# Altium PCB PCB2.PcbDoc
Units mm, origin at the board's own origin, x right, y up, seen from the top; angles counter-clockwise.
Board outline 98 x 44 mm, 4 copper layers (Top Layer, Int1 (GND), Int2 (PWR), Bottom Layer), stack 1.369 mm thick; 35 components, 49 nets, 257 pads, 54 vias.
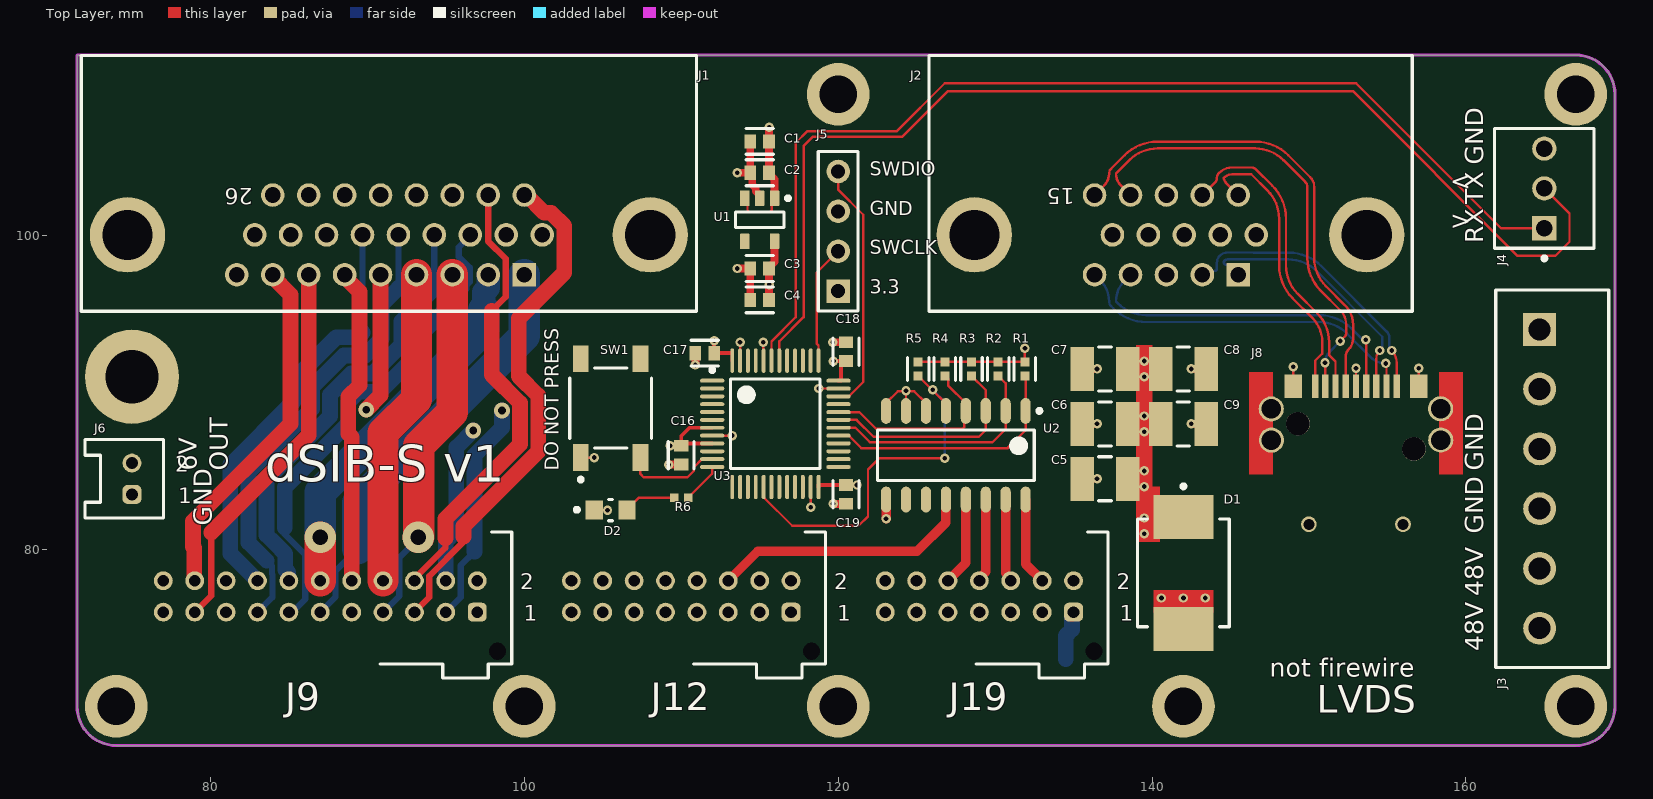
[diagram p0: Top Layer view]
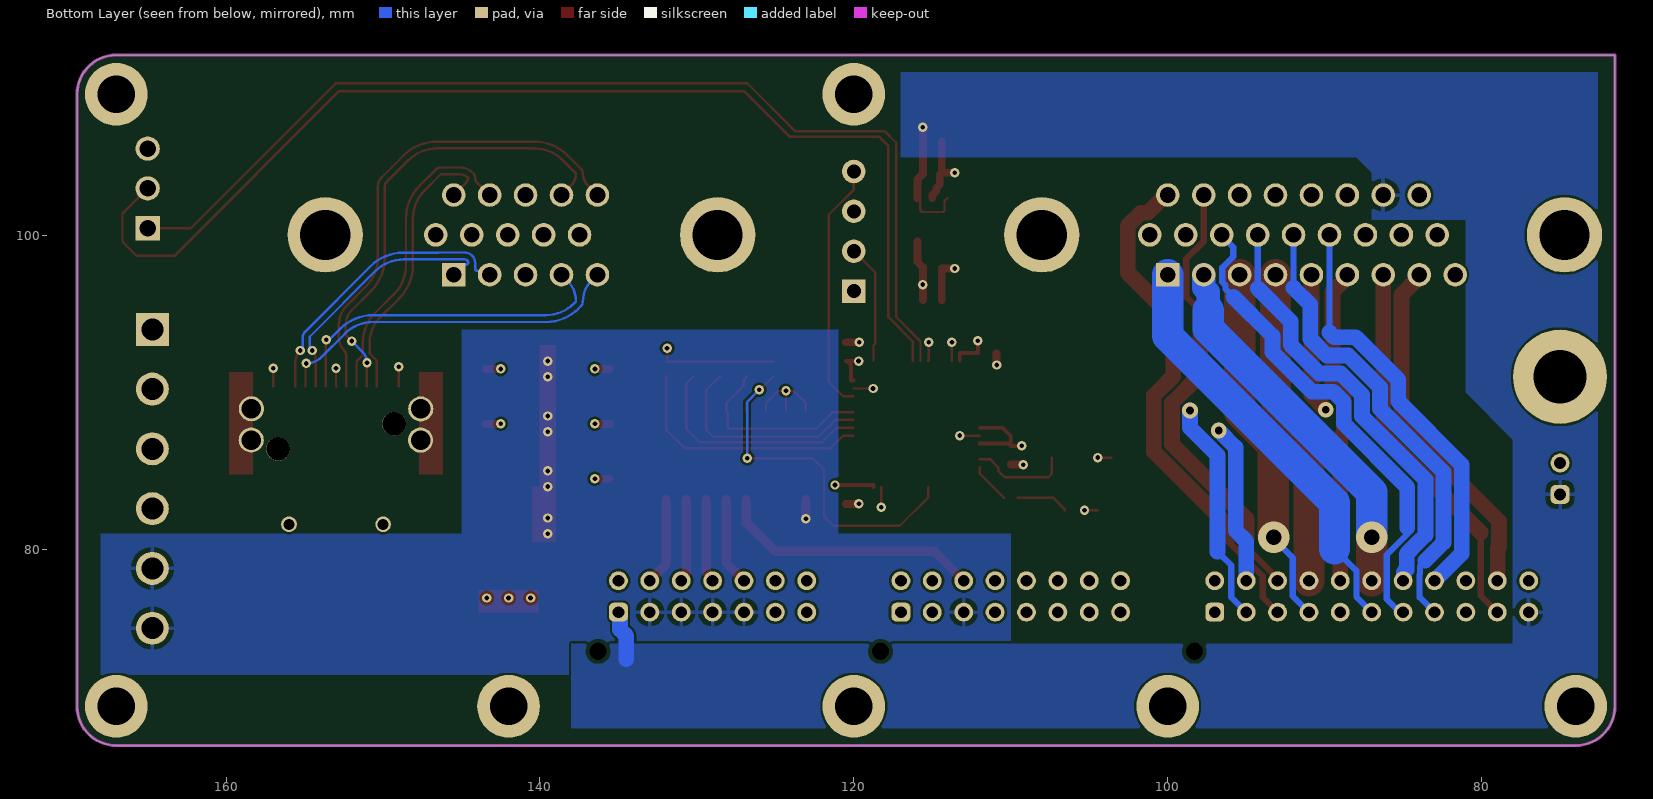
[diagram p1: Bottom Layer view, seen from below]
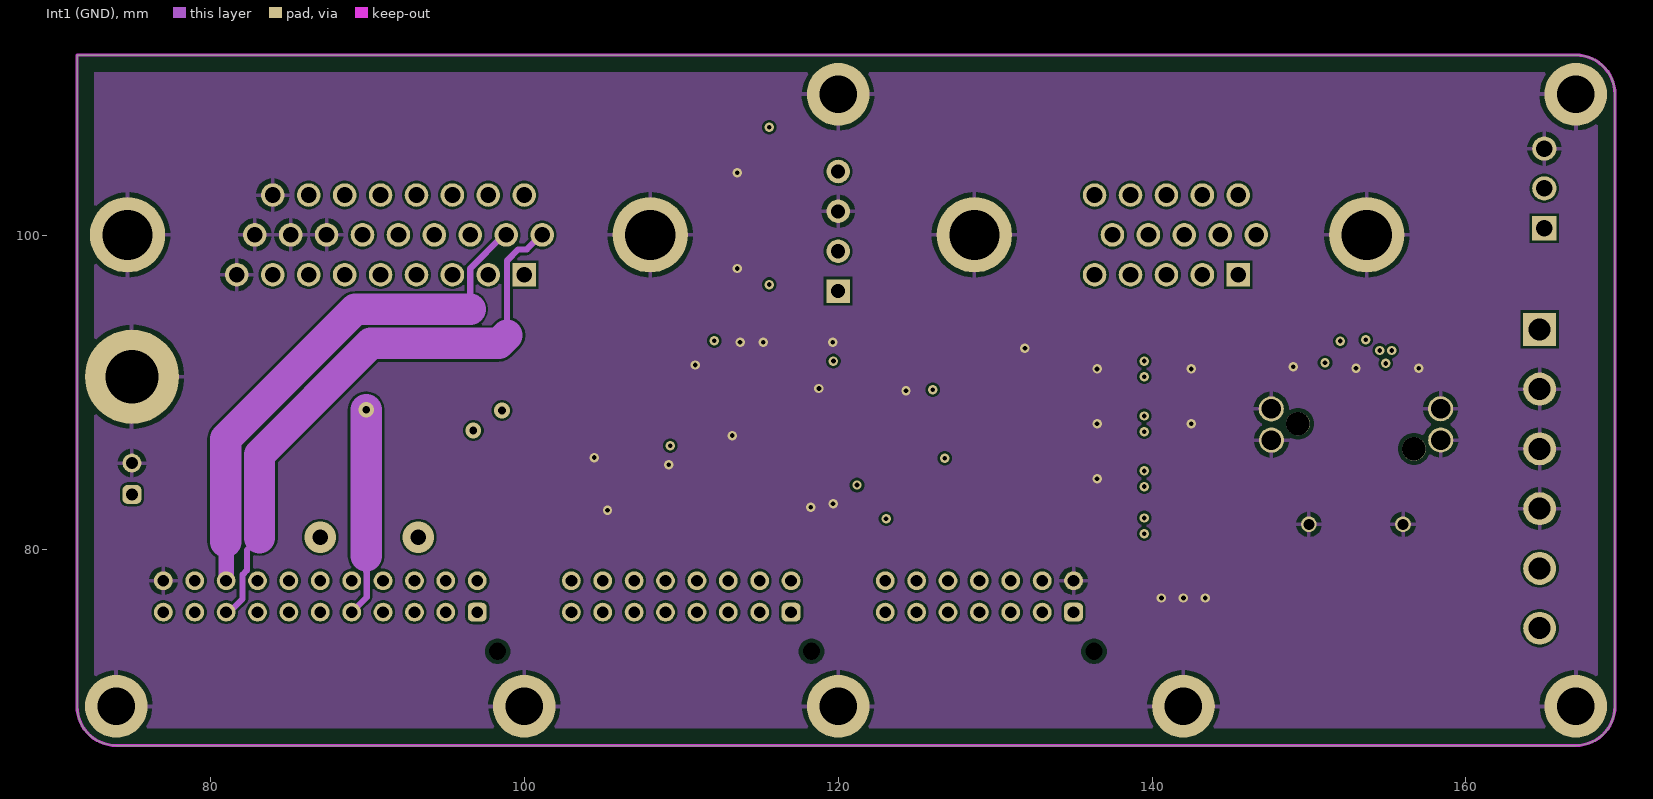
[diagram p2: Int1 (GND)]
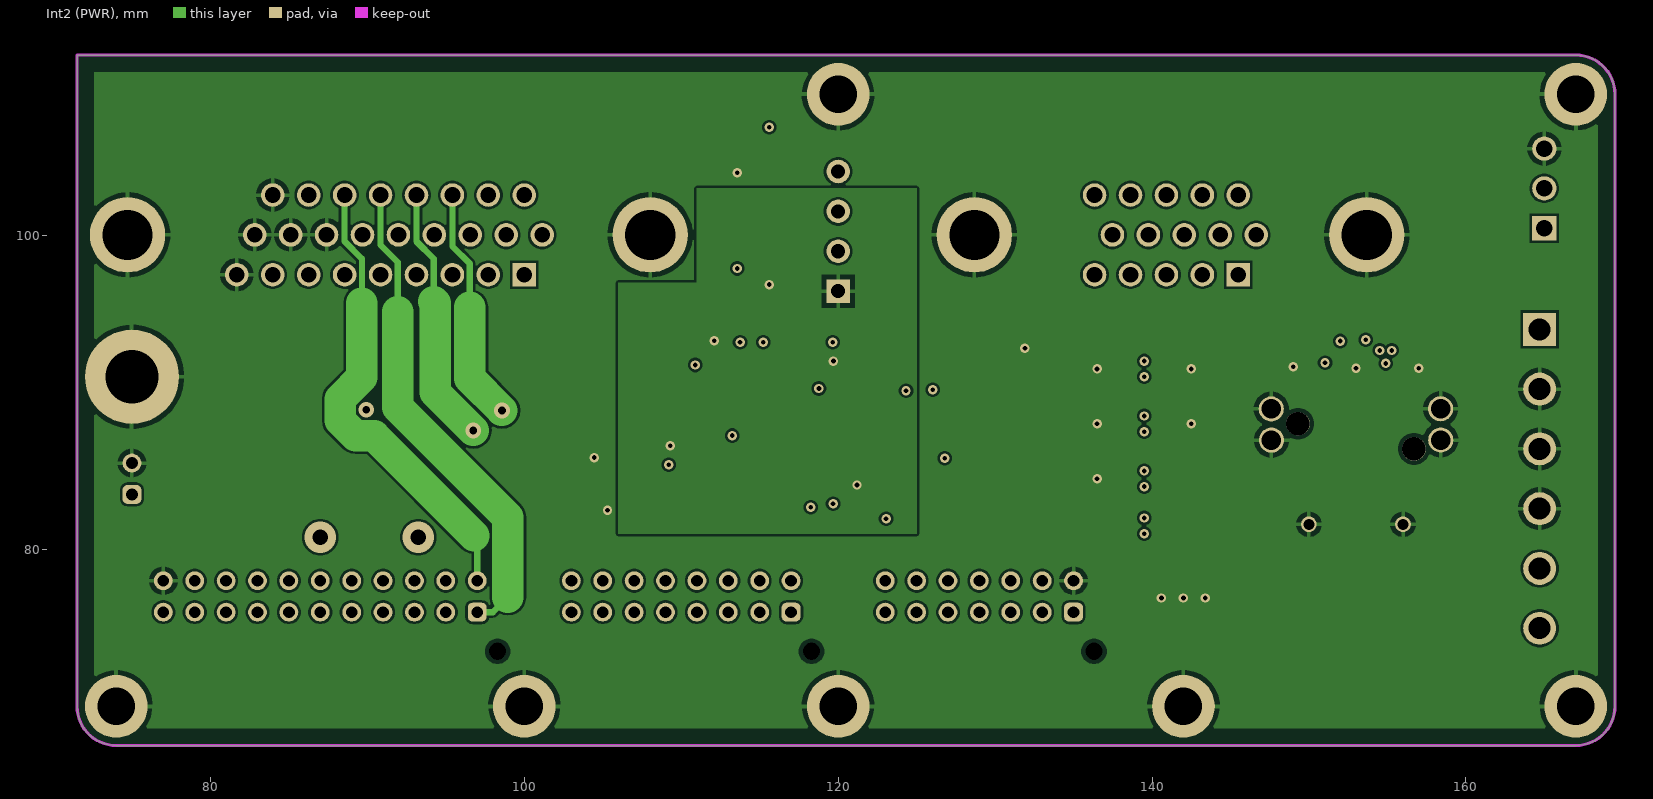
[diagram p3: Int2 (PWR)]
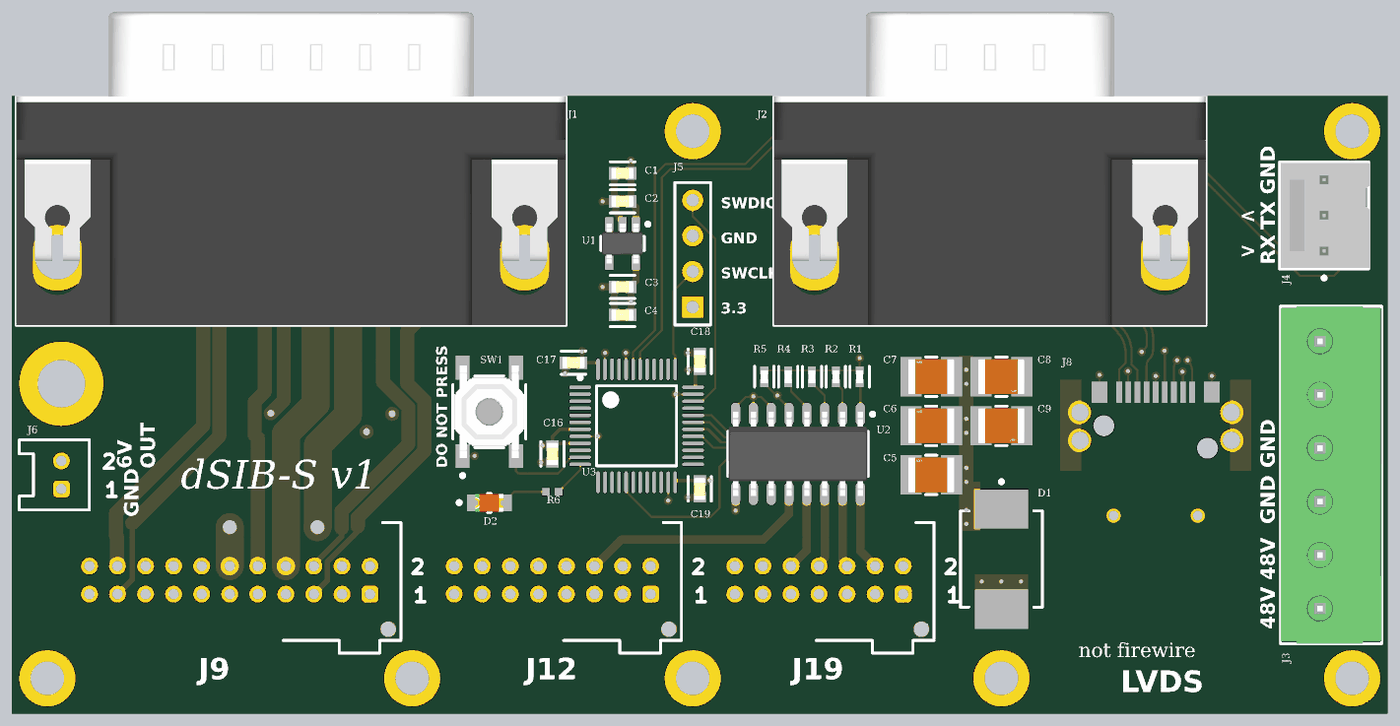
[diagram p4: 3D render of the assembled board from above, using the file's embedded part models]

## Layer stack, top to bottom
Top Solder: solder mask 0.0254, SM-001, Dk 4
Top Layer: signal copper 0.035
Dielectric 1: prepreg 0.1295, PP-017, Dk 4.3
Dielectric 2: prepreg 0.1295, PP-017, Dk 4.3
Int1 (GND): signal copper 0.035
Dielectric 3: core 0.7112, Core-039, Dk 4.8
Int2 (PWR): signal copper 0.035
Dielectric 4: prepreg 0.1295, PP-017, Dk 4.3
Dielectric 5: prepreg 0.1295, PP-017, Dk 4.3
Bottom Layer: signal copper 0.035
Bottom Solder: solder mask 0.0254, SM-001, Dk 4

## Board outline
71.5,70 ccw(c74,70) 74,67.5 167,67.5 ccw(c167,70) 169.5,70 169.5,109 ccw(c167,109) 167,111.5 71.5,111.5

## Design rules (kind name [scope] priority, off if disabled: settings)
BoardOutlineClearance [All] p1: gap=0.5 ignorepadtopadclearanceinfootprint=FALSE
Clearance Clearance_3 [InComponent('U12')] p1: gap=0.127 ignorepadtopadclearanceinfootprint=TRUE except(0.25: Arc-Hole Track-Hole SMDPad-Hole THPad-Hole Via-Hole Fill-Hole Poly-Hole Region-Hole Text-Hole)
Clearance Clearance_2 [InNetClass('hv')] p2: gap=0.25 ignorepadtopadclearanceinfootprint=TRUE
Clearance Clearance_1 [InPolygon vs OnLayer('Keep-Out Layer')] p3: gap=1 ignorepadtopadclearanceinfootprint=FALSE
Clearance [All] p4: gap=0.152 ignorepadtopadclearanceinfootprint=TRUE except(0.25: Arc-Hole Track-Hole SMDPad-Hole THPad-Hole Via-Hole Fill-Hole Poly-Hole Region-Hole Text-Hole)
ComponentClearance ComponentClearance_1 [HasFootprint('FP-D0008A-IPC_C')] p1: gap=-1000 collisioncheckmode=3 verticalgap=-1000 showdistances=FALSE donotcheckwithout3dbody=TRUE
ComponentClearance [All] p2: gap=0.102 collisioncheckmode=3 verticalgap=0.102 showdistances=TRUE
DiffPairsRouting [All] p1: maxlimit=1 minlimit=0.127 mostfreqgap=0.284 toplayer_mingap=0.284 toplayer_maxgap=0.284 toplayer_minwidth=0.152 toplayer_maxwidth=0.152 toplayer_prefwidth=0.152 midlayer1_minwidth=0.381 midlayer1_maxwidth=0.381 midlayer1_prefwidth=0.381 midlayer2_minwidth=0.381 midlayer2_maxwidth=0.381 midlayer2_prefwidth=0.381 bottomlayer_mingap=0.284 bottomlayer_maxgap=0.284 bottomlayer_minwidth=0.152 bottomlayer_maxwidth=0.152 bottomlayer_prefwidth=0.152 impedanceprofiledriven=TRUE maxuncoupledlength=12.7
Height [All] p1: minheight=0 maxheight=40 prefheight=12.7
HoleSize [All] p1: absolutevalues=TRUE maxlimit=6.3 minlimit=0.2 maxpercent=80.000 minpercent=20.000
HoleToHoleClearance [All] p1: gap=0.25 allowstackedmicrovias=FALSE
MinimumAnnularRing [All] p1: minimumring=0.076
MinimumSolderMaskSliver [All] p1: minsoldermaskwidth=0
PlaneClearance [All] p1: clearance=0.254
PlaneConnect PlaneConnect_1 [HasFootprint('TP_GND')] p1: planeconnectstyle=Direct reliefexpansion=0.508 reliefentries=4 reliefconductorwidth=0.254 reliefairgap=0.254
PlaneConnect PlaneConnectPowerPads [AsMM(Hole) > 3.4] p2: planeconnectstyle=Direct reliefexpansion=0.508 reliefentries=4 reliefconductorwidth=0.254 reliefairgap=0.254
PlaneConnect [All] p3: pad.planeconnectstyle=Relief pad.reliefexpansion=0.305 pad.reliefentries=4 pad.reliefconductorwidth=0.254 pad.reliefairgap=0.254 via.planeconnectstyle=Direct via.reliefexpansion=0.3 via.reliefentries=4 via.reliefconductorwidth=0.127 via.reliefairgap=0.127
PolygonConnect PolygonConnect_2 [HasFootprint('TP_GND')] p1: connectstyle=Direct reliefconductorwidth=0.254 reliefentries=4 polygonreliefangle="90 Angle" airgapwidth=0.254
PolygonConnect PolygonConnect_1 [InComponent('J4') And  Not  InNet('GND')] p2: connectstyle=Direct reliefconductorwidth=0.254 reliefentries=4 polygonreliefangle="90 Angle" airgapwidth=0.254
PolygonConnect PolygonConnectPowerPads [All vs (InPadClass('PowerPads'))] p3 off: connectstyle=Direct reliefconductorwidth=0.254 reliefentries=4 polygonreliefangle="90 Angle" airgapwidth=0.254
PolygonConnect [All] p4: thpad.connectstyle=Relief thpad.reliefconductorwidth=0.254 thpad.reliefentries=4 thpad.polygonreliefangle="90 Angle" thpad.airgapwidth=0.305 smdpad.connectstyle=NoConnect smdpad.reliefconductorwidth=0.102 smdpad.reliefentries=4 smdpad.polygonreliefangle="90 Angle" smdpad.airgapwidth=0.254 via.connectstyle=Direct via.reliefconductorwidth=0.127 via.reliefentries=4 via.polygonreliefangle="90 Angle" via.airgapwidth=0.127
RoutingVias [All] p1: holewidth=0.203 width=0.457 viastyle="Through Hole" minholewidth=0.2 minwidth=0.45 maxholewidth=6.3 maxwidth=6.55
ShortCircuit ShortCircuit_1 [InComponent('F1')] p1: allowed=TRUE
ShortCircuit [All] p2: allowed=FALSE
SilkToSilkClearance [All] p1: silktosilkclearance=0
SilkToSolderMaskClearance [IsPad] p1 off: minsilkscreentomaskgap=0.102 clearancetoexposedcopper=TRUE
SolderMaskExpansion [All] p1: expansion=0.05 istentingtop=FALSE
Width [All] p1: maxlimit=10 minlimit=0.127 preferedwidth=0.152
19 further rules are at their usual default settings.

## Classes and differential pairs
component class Sheet2: C1 C2 C3 C4 C5 C6 C7 C8 C9 C16 C17 C18 C19 D2 J5 R1 R2 R3 R4 R5 R6 SW1 U1 U2 U3
component class Sheet1: D1 J1 J2 J3 J4 J6 J8 J9 J12 J19
differential pair TDAT: +TDAT_P -TDAT_N
differential pair TCLK: +TCLK_P -TCLK_N
differential pair RDAT: +RDAT_P -RDAT_N
differential pair RCLK: +RCLK_P -RCLK_N

## Components (designator, comment, footprint, x,y, rotation, side; value= is the part's Value field where it differs from the comment)
C1 "C0603C225K4PACTU" FP-C0603C225K4PACTU-MFG 115,106 r180 top
C2 "C0603C225K4PACTU" FP-C0603C225K4PACTU-MFG 115,104 r180 top
C3 "C0603C225K4PACTU" FP-C0603C225K4PACTU-MFG 115,97.9 r180 top
C4 "C0603C225K4PACTU" FP-C0603C225K4PACTU-MFG 115,95.9 r180 top
C5 "12101C225KAT2A" FP-1210-L_3_3_0_4-W_2_5_0-IPC_B 137,84.5 r180 top
C6 "12101C225KAT2A" FP-1210-L_3_3_0_4-W_2_5_0-IPC_B 137,88 r180 top
C7 "12101C225KAT2A" FP-1210-L_3_3_0_4-W_2_5_0-IPC_B 137,91.5 r180 top
C8 "12101C225KAT2A" FP-1210-L_3_3_0_4-W_2_5_0-IPC_B 142,91.5 r0 top
C9 "12101C225KAT2A" FP-1210-L_3_3_0_4-W_2_5_0-IPC_B 142,88 r0 top
C16 "C0603C225K4PACTU" FP-C0603C225K4PACTU-MFG 110,86 r270 top
C17 "C0603C225K4PACTU" FP-C0603C225K4PACTU-MFG 111.5,92.5 r180 top
C18 "C0603C225K4PACTU" FP-C0603C225K4PACTU-MFG 120.5,92.6 r90 top
C19 "C0603C225K4PACTU" FP-C0603C225K4PACTU-MFG 120.5,83.5 r270 top
D1 "1SMC48AT3G" ONSC-SMC-2-403-03_V 142,78.5 r270 top
D2 "150080SS75000" FP-150080SS75000-MFG 105.5,82.5 r0 top
J1 "618026325323" 618026325323 91.37,103.32 r180 top
J2 "618015325323" 618015325323 141.18,103.32 r180 top locked
J3 "691321300006" 691321300006 165.5,84.5 r270 top
J4 "22-23-2031" MOLX-22-23-2031_V 165,103 r90 top
J5 "Header 4" HDR1X4 120,96.46 r90 top
J6 "Header 2" jst_2mm 75,83.5 r0 top
J8 "da vinci lvds connector" 1394b 153,86 r90 top
J9 "Header 11X2H" jst_pad22 97,76 r0 top
J12 "Header 8X2H" jst_pad16 117,76 r0 top
J19 "Header 7X2H" jst_pad14 135,76 r0 top
R1 "CRCW040220K0FKED" FP-CRCW0402-e3-IPC_B 131.9,91.5 r270 top
R2 "CRCW040220K0FKED" FP-CRCW0402-e3-IPC_B 130.2,91.5 r270 top
R3 "CRCW040220K0FKED" FP-CRCW0402-e3-IPC_B 128.5,91.5 r270 top
R4 "CRCW040220K0FKED" FP-CRCW0402-e3-IPC_B 126.8,91.5 r270 top
R5 "CRCW040220K0FKED" FP-CRCW0402-e3-IPC_B 125.1,91.5 r270 top
R6 "ERJ-2RKF2401X" RESC1005X40X25NL05T05 110,83.3 r180 top
SW1 "8-1437565-1" FP-8-1437565-1-MFG 105.5,89 r90 top
U1 "LP5907MFX-3.3/NOPB" DBV0005A_N 115,101 r270 top
U2 "ULN2003ADR" D0016A_M 127.5,86 r270 top
U3 "STM32F103C8T6" STM-LQFP48_L 116,88 r0 top

## Footprints (in the part's own frame and the unit in brackets; to place one, negate y for a bottom-side part, rotate by r counter-clockwise, add the part's x,y. Pads: shape width x height; smd on the part's side, far side on the other; paste and mask are expansions set on the pad)
1394b [mm]
  round 1.5 hole 1.5 unplated: 0(0.401,-3.691) 0(2.007,3.699)
  rect 1.5x0.4 smd mask+0: 1(4.401,2.605) 2(4.401,1.305) 3(4.401,-1.295) 4(4.401,-2.595) 5(4.401,-1.945) 6(4.401,-0.645) 7(4.401,0.005) 8(4.401,0.655) 9(4.401,1.955)
  round 1 hole 0.7 mask+0: 10(-4.403,-2.995) 10(-4.403,3.003)
  round 1.6 hole 1.25: 10(0.959,5.393) 10(0.964,-5.4) 10(2.953,5.4) 10(2.958,-5.393)
  rect 1.5x1.1 smd mask+0: 10(4.398,4.005) 10(4.403,-4.001)
  Top Layer region: -1.2,-5.3 5.3,-5.3 5.3,-6.8 -1.2,-6.8
  Top Layer region: -1.205,5.307 5.295,5.307 5.295,6.807 -1.205,6.807
  body extent -6.09,-6.79 5.01,6.8, height 8
618015325323 [mm] "15 pins, right angled without Hex Screw"
  rect 1.5x1.5 hole 1: 1(-4.32,5.82)
  round 1.5 hole 1: 2(-2.03,5.82) 3(0.26,5.82) 4(2.55,5.82) 5(4.84,5.82) 6(-5.46,3.28) 7(-3.17,3.28) 8(-0.88,3.28) 9(1.41,3.28) 10(3.7,3.28) 11(-4.32,0.74) 12(-2.03,0.74) 13(0.26,0.74) 14(2.55,0.74) 15(4.84,0.74)
  round 4.8 hole 3.2: M1(-12.5,3.28) M2(12.5,3.28)
  silkscreen extent -15.4,-8.15 15.4,8.15, body extent -15.4,-14.15 15.4,8.15, height 12.75
618026325323 [mm] "26 pins, right angled without Hex Screw"
  rect 1.5x1.5 hole 1: 1(-8.63,5.82)
  round 1.5 hole 1: 2(-6.34,5.82) 3(-4.05,5.82) 4(-1.76,5.82) 5(0.53,5.82) 6(2.82,5.82) 7(5.11,5.82) 8(7.4,5.82) 9(9.69,5.82) 10(-9.77,3.28) 11(-7.48,3.28) 12(-5.19,3.28) 13(-2.9,3.28) 14(-0.61,3.28) 15(1.68,3.28) 16(3.97,3.28) 17(6.26,3.28) 18(8.55,3.28) 19(-8.63,0.74) 20(-6.34,0.74) 21(-4.05,0.74) 22(-1.76,0.74) 23(0.53,0.74) 24(2.82,0.74) 25(5.11,0.74) 26(7.4,0.74)
  round 4.8 hole 3.2: M1(-16.65,3.28) M2(16.65,3.28)
  silkscreen extent -19.6,-8.15 19.6,8.15, body extent -19.6,-14.15 19.6,8.15, height 12.75
691321300006 [mm] "Vertical PCB Header, pitch 3.81mm, 06p"
  rect 2.1x2.1 hole 1.4: 1(-9.525,-0.8)
  round 2.1 hole 1.4: 2(-5.715,-0.8) 3(-1.905,-0.8) 4(1.905,-0.8) 5(5.715,-0.8) 6(9.525,-0.8)
  silkscreen extent -12.02,-3.6 12.03,3.6, body extent -12.02,-3.6 12.02,3.6, height 9.25
D0016A_M [mm] "SOIC, 16-Leads, Body 10x4mm, Pitch 1.27mm, IPC Low Density"
  oval 1.65x0.65 smd: 1(-2.825,4.445) 2(-2.825,3.175) 3(-2.825,1.905) 4(-2.825,0.635) 5(-2.825,-0.635) 6(-2.825,-1.905) 7(-2.825,-3.175) 8(-2.825,-4.445) 9(2.825,-4.445) 10(2.825,-3.175) 11(2.825,-1.905) 12(2.825,-0.635) 13(2.825,0.635) 14(2.825,1.905) 15(2.825,3.175) 16(2.825,4.445)
  silkscreen extent -2.95,-5 1.6,5.45, body extent -3,-4.95 3,4.95, height 1.59
DBV0005A_N [mm] "SOT23, 5-Leads, Body 3.05x1.75mm, Pitch 0.95mm, IPC Medium Density"
  rrect17% 1x0.6 smd: 1(-1.375,0.95) 2(-1.375,0) 3(-1.375,-0.95) 4(1.375,-0.95) 5(1.375,0.95)
  silkscreen extent -1.5,-1.55 0.5,1.93, body extent -1.42,-1.46 1.42,1.46, height 1.08
FP-8-1437565-1-MFG [mm]
  rect 1.7x1 smd paste+0 mask+0: 1(-3.15,1.9) 2(3.15,1.9) 3(-3.15,-1.9) 4(3.15,-1.9)
  silkscreen extent -4.67,-2.6 2.55,2.6, body extent -4.1,-2.7 4.1,2.7, height 0.25
FP-1210-L_3_3_0_4-W_2_5_0-IPC_B [mm]
  rect 1.503x2.804 smd paste+0 mask+0: 1(-1.45,0) 2(1.45,0)
  silkscreen extent -0.4,-1.4 0.4,1.4, body extent -2.45,-1.65 2.45,1.65, height 0.25
FP-150080SS75000-MFG [mm]
  rect 1.1x1.2 smd paste+0 mask+0: 1(-1.05,0) 2(1.05,0)
  silkscreen extent -2.27,-0.67 0.13,0.67, body extent -1.7,-0.77 1.7,0.77, height 0.25
FP-C0603C225K4PACTU-MFG [mm]
  rect 0.75x0.9 smd paste+0 mask+0: 1(-0.6,0) 2(0.6,0)
  silkscreen extent -0.87,-0.82 0.87,0.82, body extent -1.2,-0.6 1.2,0.6, height 0.25
FP-CRCW0402-e3-IPC_B [mm]
  rect 0.568x0.572 smd paste+0 mask+0: 1(-0.452,0) 2(0.452,0)
  silkscreen extent -0.74,-0.69 0.74,0.69, body extent -0.89,-0.44 0.89,0.44, height 0.25
HDR1X4 [mm] "Connector; Header; 4 Position"
  rect 1.5x1.5 hole 0.9: 1(0,0)
  round 1.5 hole 0.9: 2(2.54,0) 3(5.08,0) 4(7.62,0)
  silkscreen extent -1.27,-1.27 8.89,1.27
jst_2mm [mm]
  rrect50% 1.2x1.2 hole 0.75: 1(0,0)
  round 1.2 hole 0.75: 2(0,2)
  silkscreen extent -3,-1.5 2,3.5
jst_pad14 [mm]
  round 0 hole 1.1: 0(1.3,-2.5)
  rrect50% 1.2x1.2 hole 0.75: 1(0,0)
  round 1.2 hole 0.75: 2(0,2) 3(-2,0) 4(-2,2) 5(-4,0) 6(-4,2) 7(-6,0) 8(-6,2) 9(-8,0) 10(-8,2) 11(-10,0) 12(-10,2) 13(-12,0) 14(-12,2)
  silkscreen extent -6.2,-4.2 2.2,5.1
jst_pad16 [mm]
  round 0 hole 1.1: 0(1.3,-2.5)
  rrect50% 1.2x1.2 hole 0.75: 1(0,0)
  round 1.2 hole 0.75: 2(0,2) 3(-2,0) 4(-2,2) 5(-4,0) 6(-4,2) 7(-6,0) 8(-6,2) 9(-8,0) 10(-8,2) 11(-10,0) 12(-10,2) 13(-12,0) 14(-12,2) 15(-14,0) 16(-14,2)
  silkscreen extent -6.2,-4.2 2.2,5.1
jst_pad22 [mm]
  round 0 hole 1.1: 0(1.3,-2.5)
  rrect50% 1.2x1.2 hole 0.75: 1(0,0)
  round 1.2 hole 0.75: 2(0,2) 3(-2,0) 4(-2,2) 5(-4,0) 6(-4,2) 7(-6,0) 8(-6,2) 9(-8,0) 10(-8,2) 11(-10,0) 12(-10,2) 13(-12,0) 14(-12,2) 15(-14,0) 16(-14,2) 17(-16,0) 18(-16,2) 19(-18,0) 20(-18,2) 21(-20,0) 22(-20,2)
  silkscreen extent -6.2,-4.2 2.2,5.1
MOLX-22-23-2031_V [mm] "CONN, 3-Leads, Body 7.62x6.35mm, Pitch 2.54mm"
  rect 1.55x1.55 hole 1.05: 1(-2.54,0)
  round 1.55 hole 1.05: 2(0,0) 3(2.54,0)
  silkscreen extent -4.58,-3.18 3.81,3.18, body extent -3.73,-3.25 3.73,3.1, height 10.67
ONSC-SMC-2-403-03_V [mil] "Molded, 2-Leads, Body 6.86x5.84mm"
  rect 110x150 smd: 1(-140.49,0) 2(140.49,0)
  silkscreen extent -222,-115 135,115, body extent -135,-115 135,115, height 99
RESC1005X40X25NL05T05 [mm] "Chip Resistor, 2-Leads, Body 1.00x0.50mm, IPC Medium Density"
  rect 0.55x0.55 smd: 1(-0.45,0) 2(0.45,0)
  body extent -0.53,-0.27 0.53,0.28, height 0.4
STM-LQFP48_L [mm] "QFP, 48-Leads, Body 7x7mm, Pitch 0.5mm, IPC High Density"
  oval 1.55x0.25 smd: 1(-4.025,2.75) 2(-4.025,2.25) 3(-4.025,1.75) 4(-4.025,1.25) 5(-4.025,0.75) 6(-4.025,0.25) 7(-4.025,-0.25) 8(-4.025,-0.75) 9(-4.025,-1.25) 10(-4.025,-1.75) 11(-4.025,-2.25) 12(-4.025,-2.75) 25(4.025,-2.75) 26(4.025,-2.25) 27(4.025,-1.75) 28(4.025,-1.25) 29(4.025,-0.75) 30(4.025,-0.25) 31(4.025,0.25) 32(4.025,0.75) 33(4.025,1.25) 34(4.025,1.75) 35(4.025,2.25) 36(4.025,2.75)
  oval 0.25x1.55 smd: 13(-2.75,-4.025) 14(-2.25,-4.025) 15(-1.75,-4.025) 16(-1.25,-4.025) 17(-0.75,-4.025) 18(-0.25,-4.025) 19(0.25,-4.025) 20(0.75,-4.025) 21(1.25,-4.025) 22(1.75,-4.025) 23(2.25,-4.025) 24(2.75,-4.025) 37(2.75,4.025) 38(2.25,4.025) 39(1.75,4.025) 40(1.25,4.025) 41(0.75,4.025) 42(0.25,4.025) 43(-0.25,4.025) 44(-0.75,4.025) 45(-1.25,4.025) 46(-1.75,4.025) 47(-2.25,4.025) 48(-2.75,4.025)
  silkscreen extent -4.15,-2.85 2.85,3.55, body extent -3.5,-3.5 3.5,3.5, height 1.6

## Part data
C1 C2 C3 C4 C16 C17 C18 C19: library part CMP-2006-02259-2, "CAP CER 2.2UF 16V X5R 0603", Capacitance=2.2uF, Case Code (Imperial)=0603, Case Code (Metric)=1608, Dielectric=X5R, Dielectric Material=Ceramic, Max Operating Temperature=85°C, Min Operating Temperature=-55°C, Package Quantity=1, Tolerance=10%, Voltage=16V, Case/Package=0603, Construction=Flat, Contact Plating=Tin, Depth=0.8mm, Dissipation Factor=5%, Height=0.8mm, Lead Free="Lead Free", Length=1.6mm, Mount="Surface Mount", Number of Pins=2, Packaging="Tape and Reel", Radiation Hardening=No, REACH SVHC="No SVHC", RoHS Compliant=Yes, Series=C, Termination=SMD/SMT, Thickness=0.034inch, Voltage Rating=16V, Voltage Rating (DC)=16V, Width=0.8mm
C5 C6 C7 C8 C9: library part CMP-1038-02104-3, "General Purpose Ceramic Capacitor, 1210, 2.2uF, 10%, X7R, 15%, 100V", Capacitance=2.2uF, Case Code (Imperial)=1210, Case Code (Metric)=3225, Dielectric=X7R, Max Operating Temperature=125°C, Min Operating Temperature=-55°C, Package Quantity=1, Tolerance=10%, Voltage=100V, Case/Package=1210, Construction=Flat, Contact Plating=Tin, Depth=2.5mm, Dissipation Factor=2.5%, Height=2.79mm, Lead Free="Lead Free", Length=3.2mm, Mount="Surface Mount", Number of Pins=2, Packaging="Tape and Reel", Radiation Hardening=No, REACH SVHC="No SVHC", RoHS Compliant=Yes, Series=-, Termination=SMD/SMT, Thickness=0.11inch, Voltage Rating=100V, Voltage Rating (DC)=100V, Width=2.5mm
D1: library part CMP-1061-00550-1, "1500 W Peak Power Zener Transient Voltage Suppressor, Unidirectional, 2-Pin SMC, Pb-Free, Tape and Reel", Manufacturer="On Semiconductor", ComponentLink1Description="Manufacturer URL", ComponentLink1URL=http://www.onsemi.com/, ComponentLink2Description=Datasheet, ComponentLink2URL=http://www.onsemi.com/pub_link/Collateral/1SMC5.0AT3-D.PDF, ComponentLink3Description="Package Specification", ComponentLink3URL=http://www.onsemi.com/pub_link/Collateral/403-03.PDF, DatasheetVersion="Rev. 8", Direction=Unidirectional, IR Max (uA)=5, Mounting Technology="Surface Mount", PackageDescription="2-Pin Small Molded Package, J-Bend Lead, Body 5.845 x 6.855 mm", PackageReference=SMC-2-403-03, PackageVersion="Rev. E, 08/2005", Packing="Tape and Reel", PartNumber=1SMC48AT3G, PPK Max (W)=1500, RoHS=Pb-Free, V(BR) Typ (V)=56.1
D2: library part CMP-1426-00010-2, "LED RED CLEAR 0805 SMD", Case Code (Imperial)=0805, Case Code (Metric)=2012, Color=Red, Forward Current=30mA, Forward Voltage=1.9V, Lens Color=Colorless, Max Operating Temperature=85°C, Min Operating Temperature=-40°C, Package Quantity=1, Test Current=20mA, Case/Package=0805, Dominant Wavelength=630nm, Height=0.8mm, Length=2mm, Lens Size=1.25mm, Lens Style=Clear, Lens Transparency=Clear, Luminous Intensity=60mcd, Mount="Surface Mount", Packaging="Cut Tape", RoHS Compliant=Yes, Series=WL-SMCW, Viewing Angle=140°, Wavelength=630nm, Width=1.25mm
J1: library part CMP-1502-00305-1, "Male High Density PCB Connector without Hex Screw WR-DSUB, Angled, 26 pins", Contact Resistance=30mOhm, Manufacturer="Wurth Elektronik", Operating Temperature=-40to85degC, Rated Current=3A, Working Voltage=60VAC, Datasheet URL=https://katalog.we-online.de/em/datasheet/6180xx325323.pdf, Gender=Male, Manufacturer URL=http://www.we-online.de, Mounting Technology=THT, Orientation=Angled, Package Reference=618026325323, Packaging=Tray, Part Number=618026325323, Pin Number=26, Publisher=WurthElektronik
J2: library part CMP-1502-00304-1, "Male High Density PCB Connector without Hex Screw WR-DSUB, Angled, 15 pins", Contact Resistance=30mOhm, Manufacturer="Wurth Elektronik", Operating Temperature=-40to85degC, Rated Current=3A, Working Voltage=60VAC, Datasheet URL=https://katalog.we-online.de/em/datasheet/6180xx325323.pdf, Gender=Male, Manufacturer URL=http://www.we-online.de, Mounting Technology=THT, Orientation=Angled, Package Reference=618015325323, Packaging=Tray, Part Number=618015325323, Pin Number=15, Publisher=WurthElektronik
J3: library part CMP-1502-01867-1, "Serie 321 - 3.81mm Vertical PCB Header WR-TBL, 6 pin", Manufacturer="Wurth Elektronik", Operating Temperature=-40to105degC, Datasheet URL=http://katalog.we-online.de/em/datasheet/6913213000xx.pdf, Gender=Male, Manufacturer URL=http://www.we-online.de, Mounting Technology=THT, Package Reference=691321300006, Packaging=Box, Part Number=691321300006, Pin Number=6, Pitch=3.81mm, Publisher=WurthElektronik
J4: library part CMP-2000-05242-1, "Male Header, Pitch 2.54 mm, 1 x 3 Position, Height 8.18 mm, Tail Length 3.56 mm, RoHS, Bulk", Current Rating=4A, Manufacturer=Molex, Voltage Rating=250V, Brand=Molex, Contact Gender=Pin(Male), Contact Material=Brass, Contact Plating=Tin, Datasheet URL=https://datasheet.ciiva.com/19472/232274-19472863.pdf, Datasheet Version=Sep-01, Factory Pack Quantity=16000, Housing Material=Nylon, Manufacturer URL=http://www.molex.com/, Mounting Angle=Vertical, Mounting Style=ThroughHole, Number of Positions=3Position, Number of Rows=1Row, Packaging=Bulk, Pitch=2.54mm, Product=Headers, Product Category=Headers&WireHousings, RoHS=Details, Series=6373, Termination Style=ThroughHole, Tradename=KK, Type=Locking
J5: "Header, 4-Pin", LatestRevisionDate=17-Jul-2002, LatestRevisionNote="Re-released for DXP Platform.", Publisher="Altium Limited"
J6: "Header, 2-Pin", LatestRevisionDate=17-Jul-2002, LatestRevisionNote="Re-released for DXP Platform.", Publisher="Altium Limited"
J8: library part davinci_lvds
J9: "Header, 11-Pin, Dual row, Right Angle", LatestRevisionDate=17-Jul-2002, LatestRevisionNote="Re-released for DXP Platform.", Publisher="Altium Limited"
J12: "Header, 8-Pin, Dual row, Right Angle", LatestRevisionDate=17-Jul-2002, LatestRevisionNote="Re-released for DXP Platform.", Publisher="Altium Limited"
J19: "Header, 7-Pin, Dual row, Right Angle", LatestRevisionDate=17-Jul-2002, LatestRevisionNote="Re-released for DXP Platform.", Publisher="Altium Limited"
R1 R2 R3 R4 R5: library part CMP-2002-08356-2, "RES Thick Film, 20kΩ, 1%, 0.063W, 100ppm/°C, 0402", Case Code (Imperial)=0402, Case Code (Metric)=1005, Max Operating Temperature=155°C, Max Power Dissipation=63mW, Min Operating Temperature=-55°C, Package Quantity=10, Resistance=20kR, Temperature Coefficient=100ppm/°C, Tolerance=1%, Voltage Rating=50V, Case/Package=0402, Composition="Thick Film", Contact Plating=Tin, Depth=0.5mm, Features="Automotive AEC-Q200", Height=0.35mm, Lead Free="Lead Free", Length=1mm, Military Standard=Not, Mount="Surface Mount", Number of Pins=2, Number of Terminations=2, Packaging="Tape and Reel", Power Rating=63mW, Radiation Hardening=No, Termination=SMD/SMT, Voltage Rating (DC)=50V, Weight=2.3E-05oz, Width=0.5mm, Working Voltage=50V
R6: library part CMP-2002-00798-1, Manufacturer=Panasonic, Part Number=ERJ-2RKF2401X
SW1: library part CMP-03407-000016-1, "SWITCH TACTILE SPST-NO 0.02A 15V", Case/Package=SMD/SMT, Contact Current Rating=20mA, Contact Resistance=100mR, Max Operating Temperature=85°C, Max Voltage Rating (DC)=15V, Min Operating Temperature=-35°C, Operating Force=1.57N, Package Quantity=4000, Actuator Length=0.4mm, Actuator Material=Brass, Actuator Type=Standard, Contact Material="Copper Alloy", Contact Plating=Silver, Electrical Life=500000Cycles, ELV=Compliant, Illumination Type=Non-Illuminated, Max Current Rating=20mA, Mechanical Life=500000Cycles, Mount="Surface Mount", Orientation=Straight, Packaging="Tape and Reel", Radiation Hardening=No, RoHS Compliant=Yes, Series=FSMCT, Switch Function=Off-Mom, Switch Travel=0.25mm, Termination="Gull Wing", Throw Configuration=SPST, Type=Switch, Voltage Rating (DC)=15V
U1: library part CMP-2000-07464-2, "None", Case/Package=SOT-23, Dropout Voltage=250mV, Max Input Voltage=5.5V, Max Operating Temperature=125°C, Max Output Current=250mA, Min Input Voltage=2.2V, Min Operating Temperature=-40°C, Nominal Output Voltage=3.3V, Output Voltage Accuracy=2%, Package Quantity=3000, Power Supply Rejection Ratio (PSRR)=82dB, Quiescent Current=425uA, Accuracy=2%, Contact Plating=Tin, Lead Free="Lead Free", Mount="Surface Mount", Number of Outputs=1, Number of Pins=5, Number of Regulators=1, Output Current=250mA, Output Type=Fixed, Output Voltage=3.3V, Packaging="Tape and Reel", Polarity=Positive, Radiation Hardening=No, REACH SVHC="No SVHC", RoHS Compliant=Yes
U2: library part CMP-2000-04953-1, "High-Voltage, High-Current Darlington Transistor Array, 0.5 A, 50 V, -20 to 70 degC, 16-Pin SOIC (D), Green (RoHS & no Sb/Br), Tape and Reel", Manufacturer=TexasInstruments, Maximum Collector Emitter Saturation Voltage=1.1@100mA, Maximum Collector Emitter Voltage=50V, Package=16SOIC, Package Description="16-Pin Plastic Small Outline, Body 9.9 x 3.9 mm, Pitch 1.27 mm", Package Reference=D16, Package Version="4040047-6/M, 06/2011", Peak DC Collector Current=0.5A, Category=DarlingtonBJT, Configuration=Array7, Datasheet URL=http://www.ti.com/general/docs/lit/getliterature.tsp?genericPartNumber=uln2003a&fileType=pdf, Datasheet Version="Rev. O, 01/2016", Manufacturer URL=http://www.ti.com/, Mounting=SurfaceMount, Package URL=http://www.ti.com/lit/ml/mpds178g/mpds178g.pdf, Packaging=Tape&Reel, Rad Hard=No, Type=NPN
U3: library part CMP-0237-00215-3, "ARM Cortex-M3 32-bit MCU, 64 KB Flash, 20 KB Internal RAM, 37 I/Os, 48-pin LQFP, -40 to 85 degC, Tray", I/Os (High Current)=37, Operating Frequency(F) (Processor speed) (MHz)=72, Supply Voltage(Vcc) min (V)=2, A/D Converter="2x12-bit (10 Channel)", ComponentLink1Description="Manufacturer URL", ComponentLink1URL=http://www.st.com/web/en/home.html, ComponentLink2Description=Datasheet, ComponentLink2URL=http://www.st.com/st-web-ui/static/active/en/resource/technical/document/datasheet/CD00161566.pdf, ComponentLink3Description="Package Specification", ComponentLink3URL=http://www.st.com/st-web-ui/static/active/en/resource/technical/document/datasheet/DM00058181.pdf, Core="ARM Cortex-M3", DatasheetVersion="Rev. 16", FLASH Size (Prog) (kB)=64, Internal RAM Size (kB)=20, Mounting Technology="Surface Mount", PackageDescription="48-Pin Low Profile Quad Flat Package, 7 x 7 mm Body, 0.5 mm Pitch", PackageReference=LQFP48, PackageVersion="Rev. 6, 06/2013", Packing=Tray, PartNumber=STM32F103C8T6

## Free pads (board coordinates)
  round 4 hole 2.4: 0(74,70) 0(100,70) 0(120,70) 0(120,109) 0(142,70) 0(167,70) 0(167,109)
  round 6 hole 3.4: 0(75,91)

## Via types
v1: diameter 0.6, hole 0.3, Top Layer to Bottom Layer, tented both sides, 49 vias
v2: diameter 1, hole 0.5, Top Layer to Bottom Layer, tented both sides, 3 vias
v3: diameter 2, hole 1, Top Layer to Bottom Layer, tented both sides, 2 vias

## Nets (pads, with @x,y where several pads share a name; then routed paths per layer and width w, separated by ;. In a path a pad name is that pad's centre, name@x,y a point inside that pad or via, vN(x,y) a via of type N, cw(c..) or ccw(c..) an arc to the next point about the centre after c; other vN are vias at no path point)
/BRAKE1: J1.20 J9.6 | length 28.9
  Top Layer w0.4: J9.6 93,78.128 94.975,80.103 94.975,80.7 ; J1.20 97.71,99.621 98.812,98.519 98.812,96.087 97.925,95.2
  Top Layer w1: 94.975,80.7 94.975,81.95 99.727,86.702 99.727,89.327 97.925,91.13 97.925,95.2
/BRAKE2: J1.22 J9.4 | length 26.8
  Int2 (PWR) w0.4: J1.22 93.13,99.621 94.232,98.519 94.232,95.793
  Int2 (PWR) w2: 94.232,95.793 94.325,95.7 94.325,90 v2(96.75,87.575)
  Bottom Layer w1: J9.4 95,80.525 95.673,81.198 95.673,86.498 v2(96.75,87.575)
/BRAKE3: J1.24 J9.2 | length 29.9
  Int2 (PWR) w0.4: J1.24 88.55,99.621 89.652,98.519 89.652,95.702 ; 96.798,80.877 97,80.675 J9.2
  Int2 (PWR) w2: 89.652,95.702 89.652,90.964 88.273,89.584 88.273,88.216 89.241,87.248 90.427,87.248 96.798,80.877
/MOTOR1: J1.2 J9.12 | length 23.9
  Top Layer w2: J9.12 v3(87,80.775)
  Bottom Layer w1.5: 97.425,95.25 97.425,96.387 97.71,96.672 J1.2
  Bottom Layer w2: v3(87,80.775) 87,83.638 97.425,94.063 97.425,95.25
/MOTOR2: J1.4 J9.8 | length 20.4
  Top Layer w2: J9.8 91,87.425 93.13,89.555 J1.4
/MOTOR3: J1.6 J9.10 | length 20.3
  Top Layer w1: J1.6 88.55,97.365 89.5,96.415 89.5,90.45 88.773,89.723 88.773,87.377 89,87.15 J9.10
/MOTOR4: J1.8 J9.20 | length 22.6
  Top Layer w1: J9.20 78.962,78.038 78.962,80.092 78.895,80.159 78.895,81.8 85.108,88.012 85.108,96.227 83.97,97.365 J1.8
/MOTOR5: J1.11 J9.18 | length 33.8
  Int1 (GND) w0.4: 96.55,95.3 96.55,97.899 98.691,100.04 J1.11
  Int1 (GND) w1: 80.975,80.475 81,80.45 J9.18
  Int1 (GND) w2: 80.975,80.475 80.975,87.05 89.225,95.3 96.55,95.3
/MOTOR6: J1.13 J9.14 | length 27.8
  Bottom Layer w0.4: 94.27,96.645 J1.13
  Bottom Layer w1: 84.775,78.7 84.775,79.718 84.075,80.418 83.576,80.917 83.576,84.442 87.62,88.486 87.62,89.855 88.97,91.205 90.339,91.205 92.168,93.034 92.168,94.543 94.27,96.645 ; 84.805,78.7 84.962,78.543 84.962,78.038 J9.14
/MOTOR7: J1.15 J9.16 | length 27
  Bottom Layer w0.4: 89.69,93.815 J1.15
  Bottom Layer w1: J9.16@82.962,78.038 81.271,79.729 81.271,85.396 85.315,89.44 85.315,90.809 88.016,93.51 89.385,93.51 89.69,93.815
BRAKE1: J1.19 J9.5 | length 32.9
  Top Layer w0.4: J9.5 93.952,76.952 93.952,78.299 96.127,80.474 96.127,80.825
  Top Layer w1: 96.127,80.825 96.127,81.473 100.88,86.225 100.88,89.805 99.648,91.037 99.648,94.725 102.542,97.62 102.542,100.621 101.721,101.442 101.273,101.442 100.135,102.58 J1.19
BRAKE2: J1.21 J9.3 | length 29.4
  Int2 (PWR) w0.4: J1.21 95.42,99.32 96.525,98.215 96.525,95.425
  Int2 (PWR) w2: 96.525,95.425 96.525,90.9 v2(98.575,88.85)
  Bottom Layer w0.4: J9.3 95.952,76.952 95.952,78.977 96.825,79.85
  Bottom Layer w1: 96.825,79.85 96.825,86 98.575,87.75 v2(98.575,88.85)
BRAKE3: J1.23 J9.1 | length 31.3
  Int2 (PWR) w0.4: J1.23 90.84,99.39 91.942,98.288 91.942,95.142 ; J9.1 98,76 98.95,76.95
  Int2 (PWR) w2: 91.942,95.142 91.942,89.058 98.95,82.05 98.95,76.95
button: SW1.3 U3.11 | length 6.3
  Top Layer w0.152: SW1.3 107.4,84.8 107.6,84.6 110.4,84.6 110.797,84.997 110.797,85.222 111.325,85.75 U3.11
GND: C1.2 C2.2 C3.2 C4.2 C5.2 C6.2 C7.2 C8.2 C9.2 C16.2 C17.2 C18.2 C19.2 D1.2 D2.1 J1.9 J1.16 J1.17 J1.18 J1.26 J1.M1 J1.M2 J2.M1 J2.M2 J3.2 J3.3 J3.4 J4.3 J5.3 J6.2 J8.7 J8.10 J9.22 J19.2 pad.0 R1.1 R2.1 R3.1 R4.1 R5.1 SW1.1 U1.2 U2.6 U2.7 U2.8 U3.8 U3.23 U3.35 U3.44 U3.47 | length 40.1
  Top Layer w0.152: SW1.1 v1(104.45,85.85) ; D2.1 v1(105.3,82.5) ; U3.8 v1(113.25,87.25) ; U3.47 v1(113.75,93.2) ; v1(115.222,93.2) 115.236,93.186 115.236,92.039 U3.44 ; v1(118.25,82.675) U3.23 ; v1(118.775,90.25) U3.35 ; U2.8 123.055,89.325 123.796,90.066 124.291,90.066 v1(124.325,90.1) ; U2.7 v1(124.325,90.1) ; R5.1 R4.1 R3.1 R2.1 R1.1 v1(131.9,92.825) ; U2.6 125.595,89.325 124.854,90.066 124.359,90.066 v1(124.325,90.1) ; J8.10@148.995,90.398 v1(148.995,91.63) ; J8.7 153,90.406 v1(153,91.55) ; v1(157,91.55) v1(157,91.55) J8.10@157.001,90.403
  Top Layer w0.5: v1(109.2,85.4) C16.2 ; v1(110.9,91.75) C17.2 ; v1(113.575,97.9) C3.2 C4.2 ; v1(113.575,104) C2.2 ; C1.2 C2.2 ; U1.2 115,102.575 114.752,102.822 114.752,103.012 114.525,103.239 114.525,103.875 C2.2 ; v1(119.65,93.2) C18.2 ; v1(119.675,82.9) C19.2 ; C5.2 v1(136.5,84.5) ; C6.2 v1(136.5,88) ; C7.2 v1(136.5,91.5) ; v1(142.5,88) C9.2 ; v1(142.5,91.5) C8.2
  Int1 (GND) w0.152: v1(115.222,93.2) v1@115.247,93.225
  other v1: 140.6,76.9 142,76.9 143.4,76.9
IN_SJ_BRAKE1: R5.2 U2.5 U3.17 | length 24.2
  Top Layer w0.152: U3.17 115.25,83.325 117.075,81.5 121.3,81.5 121.9,82.1 121.9,85.1 122.6,85.8 v1(126.8,85.8) ; R5.2 125.102,91.048 v1@125.984,90.166 ; v1(126.034,90.166) v1@125.984,90.166 ; U2.5 126.865,89.285 v1@125.984,90.166
  Bottom Layer w0.152: v1(126.034,90.166) 126.8,89.4 v1(126.8,85.8)
IN_SJ_BRAKE2: R1.2 U2.1 U3.29 | length 16.2
  Top Layer w0.152: U3.29 120.675,87.25 121.475,86.45 130.8,86.45 131.945,87.595 U2.1 131.945,91.003 R1.2
IN_SJ_BRAKE3: R2.2 U2.2 U3.30 | length 15
  Top Layer w0.152: U3.30 121.1,87.75 122.025,86.825 129.825,86.825 130.675,87.675 U2.2 130.675,90.575 130.202,91.048 R2.2
IN_SJ_BRAKE4: R3.2 U2.3 U3.31 | length 13.8
  Top Layer w0.152: U3.31 121.175,88.25 122.25,87.175 128.975,87.175 129.405,87.605 U2.3 129.405,90.145 R3.2 R3.2
IN_SJ_BRAKE5: R4.2 U2.4 U3.32 | length 12.4
  Top Layer w0.152: U3.32 121.348,88.75 122.423,87.675 127.925,87.675 128.04,87.79 128.04,88.73 U2.4 128.135,89.325 127.01,90.45 127.01,90.84 126.802,91.048 R4.2
LED1: R6.1 U3.12 | length 2.6
  Top Layer w0.152: R6.1 111.975,84.825 U3.12
MOTOR1: J1.1 J9.11 | length 26.9
  Bottom Layer w0.4: J9.11 87.975,76.975 87.975,78.65 89.375,80.05
  Bottom Layer w2: 89.375,80.05 89.375,82.969 100,93.594 J1.1
MOTOR2: J1.3 J9.7 | length 23.3
  Top Layer w2: v3(93.25,80.775) 93.275,80.8 93.275,86.6 95.42,88.745 J1.3
  Bottom Layer w0.4: J9.7 92.025,77.025 92.025,79.454 93.25,80.679 v3(93.25,80.775)
MOTOR3: J1.5 J9.9 | length 22.3
  Top Layer w1: v2(89.925,88.9) 90.84,89.815 J1.5
  Int1 (GND) w0.4: J9.9 89.952,76.952 89.952,78.577 89.925,78.604 89.925,79.575
  Int1 (GND) w2: 89.925,79.575 v2(89.925,88.9)
MOTOR4: J1.7 J9.19 | length 24.5
  Top Layer w0.4: J9.19 80.048,77.048 80.048,81.073
  Top Layer w1: 80.048,81.073 86.26,87.285 J1.7
MOTOR5: J1.10 J9.17 | length 37.6
  Int1 (GND) w0.4: J9.17 81.2,76 82.048,76.848 82.048,78.394 82.327,78.674 82.327,79.95 83.127,80.75 ; 98.898,93.652 98.898,98.396 99.614,99.113 100.158,99.113 101.085,100.04 J1.10
  Int1 (GND) w2: 83.127,80.75 83.127,86.027 90.225,93.125 98.37,93.125 98.898,93.652
MOTOR6: J1.12 J9.13 | length 31.4
  Bottom Layer w0.4: 84.729,81.394 84.729,80.97 86.048,79.651 86.048,76.831 85.216,76 J9.13 ; 95.825,96.098 96.323,96.595 96.323,96.844 96.522,97.043 96.522,97.957 95.825,98.654 95.825,99.256 96.56,99.991 J1.12
  Bottom Layer w1: 84.729,81.394 84.729,83.964 88.773,88.008 88.773,89.377 89.448,90.052 90.817,90.052 93.321,92.557 93.321,93.593 95.825,96.098
MOTOR7: J1.14 J9.15 | length 29.8
  Bottom Layer w0.4: J9.15 83.952,76.952 83.952,78.394 83.923,78.424 83.923,78.941 83.598,79.265 ; J1.14 91.98,97.255 91.985,97.25 91.985,96.662
  Bottom Layer w1: 83.598,79.265 82.424,80.439 82.424,84.919 86.468,88.963 86.468,90.332 88.493,92.357 89.862,92.357 90.923,93.419 90.923,95.6 91.985,96.662
NetD2_2: D2.2 R6.2 | length 3.4
  Top Layer w0.152: D2.2 106.55,82.55 107.3,83.3 R6.2
RCLK_N: J2.12 J8.2 | length 19.9
  Top Layer w0.152: J2.12 144.018,103.388 ccw(c143.731,103.675) 144.137,103.675 cw(c144.573,103.675) 144.265,103.983 cw(c145.116,103.132) 145.116,104.336 146.325,104.336 cw(c146.325,103.9) 146.633,104.209 147.664,103.177 cw(c145.56,101.073) 148.536,101.073 148.536,98.091 ccw(c151.076,98.091) 149.28,96.295 150.525,95.05 cw(c148.688,93.213) 151.286,93.213 151.286,92.387 151.695,91.978 J8.2
RCLK_P: J2.11 J8.1 | length 18.5
  Top Layer w0.152: J2.11 144.692,103.388 cw(c144.979,103.675) 144.573,103.675 cw(c145.116,103.132) 145.116,103.9 146.325,103.9 147.356,102.869 cw(c145.56,101.073) 148.1,101.073 148.1,98.091 ccw(c151.076,98.091) 148.972,95.987 150.217,94.742 cw(c148.688,93.213) 150.85,93.213 150.85,92.473 150.395,92.018 J8.1
RDAT_N: J2.15 J8.8 | length 30.5
  Top Layer w0.152: J2.15 136.954,103.194 ccw(c136.197,103.95) 137.267,103.95 cw(c137.703,103.95) 137.394,104.258 138.251,105.114 cw(c140.355,103.01) 140.355,105.986 146.573,105.986 cw(c146.573,103.01) 148.677,105.114 150.083,103.708 cw(c149.473,103.098) 150.336,103.098 150.336,98.566 ccw(c152.876,98.566) 151.08,96.77 152.3,95.55 cw(c151.066,94.316) 152.811,94.316 152.811,93.417 cw(c151.858,93.417) 152.532,92.743 ccw(c152.978,92.297) 152.347,92.297 152.347,91.872 ; J8.8 152.347,90.403 152.347,91.872 ; 152.35,91.875 152.347,91.872
RDAT_P: J2.14 J8.9 | length 29.5
  Top Layer w0.152: J2.14 138.016,103.194 cw(c138.773,103.95) 137.703,103.95 138.559,104.806 cw(c140.355,103.01) 140.355,105.55 146.573,105.55 cw(c146.573,103.01) 148.369,104.806 149.775,103.4 cw(c149.473,103.098) 149.9,103.098 149.9,98.566 ccw(c152.876,98.566) 150.772,96.462 151.992,95.242 cw(c151.066,94.316) 152.375,94.316 152.375,93.8 cw(c152.013,93.8) 152.269,93.544 v1(152,93.275) ; v1(151.025,91.9) 151.035,91.89 151.035,90.411 J8.9
  Bottom Layer w0.152: v1(151.025,91.9) cw(c151.991,91.9) 151.308,92.583 v1(152,93.275)
RX: J4.1 U3.43 | length 67.6
  Top Layer w0.152: U3.43 115.75,93.25 117.3,94.8 117.3,105.907 118.046,106.654 123.746,106.654 126.793,109.7 153.007,109.7 162.247,100.46 J4.1
SJ_BRAKE1: J12.6 U2.12 | length 16.9
  Top Layer w0.6: J12.6 114.875,79.875 125.025,79.875 126.865,81.715 U2.12
SJ_BRAKE2: J19.4 U2.16 | length 5.6
  Top Layer w0.6: U2.16 131.945,79.066 133,78.011 J19.4
SJ_BRAKE3: J19.6 U2.15 | length 5.3
  Top Layer w0.6: U2.15 130.675,78.487 131,78.162 J19.6
SJ_BRAKE4: J19.8 U2.14 | length 5.3
  Top Layer w0.6: J19.8 129,78.162 129.405,78.567 U2.14
SJ_BRAKE5: J19.10 U2.13 | length 5.6
  Top Layer w0.6: J19.10 128.135,79.135 U2.13
SWCLK: J5.2 U3.37 | length 7.6
  Top Layer w0.152: U3.37 118.75,93 118.625,93.125 118.625,97.625 J5.2
SWDIO: J5.4 U3.34 | length 16
  Top Layer w0.152: J5.4 120,102.924 121.6,101.324 121.6,90.675 120.675,89.75 U3.34
TCLK_N: J2.2 J8.4 | length 18.3
  Top Layer w0.152: v1(155.269,92.675) cw(c154.483,91.889) 155.595,91.889 J8.4
  Bottom Layer w0.152: J2.2 143.241,97.531 cw(c143.75,97.022) 143.75,97.741 143.985,97.741 ccw(c143.985,97.894) 144.092,97.786 ccw(c143.985,97.894) 144.137,97.894 144.137,98.262 cw(c144.79,98.262) 144.328,98.723 cw(c144.79,98.262) 144.79,98.915 146.481,98.915 146.484,98.911 148.698,98.911 cw(c148.698,95.935) 150.802,98.039 154.983,93.858 cw(c154.675,93.55) 155.111,93.55 155.111,92.825 155.261,92.675 v1(155.269,92.675)
TCLK_P: J2.1 J8.3 | length 16.7
  Top Layer w0.152: J8.3 154.295,92.139 cw(c155.052,92.139) v1(154.517,92.675)
  Bottom Layer w0.152: J2.1 144.935,98.065 144.826,98.136 144.731,98.136 cw(c144.731,98.289) 144.592,98.35 cw(c144.79,98.262) 144.614,98.388 cw(c144.737,98.299) 144.642,98.418 cw(c144.816,98.198) 144.816,98.479 146.3,98.479 146.304,98.475 148.698,98.475 cw(c148.698,95.935) 150.494,97.731 154.675,93.55 154.675,92.825 154.525,92.675 v1(154.517,92.675)
TDAT_N: J2.5 J8.5 | length 22.5
  Top Layer w0.152: v1(154.9,91.85) cw(c154.791,91.741) 154.945,91.741 J8.5
  Bottom Layer w0.152: J2.5 136.72,97.12 cw(c135.401,95.8) 137.267,95.8 ccw(c137.703,95.8) 137.394,95.492 137.526,95.361 ccw(c139.63,97.465) 139.63,94.489 150.634,94.489 cw(c150.634,91.949) 152.43,93.745 153.918,92.257 ccw(c154.9,93.238) v1(154.9,91.85)
TDAT_P: J2.4 J8.6 | length 21.7
  Top Layer w0.152: v1(153.625,93.35) 153.625,93.175 cw(c153.577,93.127) 153.645,93.127 J8.6
  Bottom Layer w0.152: J2.4 138.25,97.12 ccw(c139.569,95.8) 137.703,95.8 137.834,95.669 ccw(c139.63,97.465) 139.63,94.925 150.634,94.925 cw(c150.634,91.949) 152.738,94.053 v1@153.633,93.158
TX: J4.2 U3.42 | length 73.4
  Top Layer w0.152: U3.42 116.25,93.25 117.8,94.8 117.8,105.7 118.4,106.3 124.1,106.3 127,109.2 152.8,109.2 163.3,98.7 165.7,98.7 166.6,99.6 166.6,101.4 J4.2
VDD3.3: C3.1 C4.1 C16.1 C17.1 C18.1 C19.1 J5.1 U1.5 U3.7 U3.9 U3.24 U3.36 U3.48 | length 16.7
  Top Layer w0.25: v1(109.3,86.6) C16.1 ; U3.9 110.15,86.75 C16.1 ; U3.7 110.525,87.75 110,87.225 C16.1 ; v1(112.1,93.3) C17.1 113.25,92.5 U3.48 ; U3.24 118.75,84.1 C19.1 v1(121.2,84.1) ; v1(119.7,92) C18.1@120.425,92 ; U3.36 120.175,90.75 120.175,91.75 C18.1@120.425,92 ; C18.1 C18.1@120.425,92
  Top Layer w0.5: C4.1 C3.1 115.6,97.975 115.95,98.325 U1.5
  other v1: 115.6,96.875
VDD6: C1.1 C2.1 J1.25 J6.1 J9.21 J19.1 U1.1 U1.3 | length 11.3
  Top Layer w0.152: U1.3 114.223,102.202 114.223,101.589 114.312,101.5 115.65,101.5 115.777,101.627 115.777,102.202 U1.1
  Top Layer w0.5: v1(115.6,106.9) C1.1 C2.1 115.6,103.925 115.95,103.575 U1.1
  Top Layer w1: J19.1@134.9,75.9 J19.1
  Bottom Layer w1: 134.5,73.004 134.5,74.5 134.9,74.9 134.9,75.9 J19.1
VM48: C5.1 C6.1 C7.1 C8.1 C9.1 D1.1 J3.5 J3.6 J12.5 J19.3 J19.5 J19.7 J19.9 U2.9 | length 1.2
  Top Layer w0.6: v1(123.055,81.955) U2.9
  other v1: 139.5,81 139.5,82 139.5,84 139.5,85 139.5,87.5 139.5,88.5 139.5,91 139.5,92
pads on no net: J2.3 J2.6 J2.7 J2.8 J2.9 J2.10 J2.13 J3.1 J8.0 J9.0 J12.0 J12.1 J12.2 J12.3 J12.4 J12.7 J12.8 J12.9 J12.10 J12.11 J12.12 J12.13 J12.14 J12.15 J12.16 J19.0 J19.11 J19.12 J19.13 J19.14 SW1.2 SW1.4 U1.4 U2.10 U2.11 U3.1 U3.2 U3.3 U3.4 U3.5 U3.6 U3.10 U3.13 U3.14 U3.15 U3.16 U3.18 U3.19 U3.20 U3.21 U3.22 U3.25 U3.26 U3.27 U3.28 U3.33 U3.38 U3.39 U3.40 U3.41 U3.45 U3.46

## Polygon pours and split planes (outlines as drawn)
VM48 on Bottom Layer "VM48_L04_P006" (solid, pour order 6): 168,81 145,81 145,94 121,94 121,81 110,81 110,72 168,72
VDD6 on Bottom Layer "VDD6_L04_P003" (solid, pour order 3): 117,111 72,111 72,68 138,68 138,74 78,74 78,87 81,90 81,101 87,101 87,104 88,105 117,105
GND on Int2 (PWR) "GND_L03_P005" (solid, pour order 5): 71.5,70 ccw(c74,70) 74,67.5 167,67.5 ccw(c167,70) 169.5,70 169.5,109 ccw(c167,109) 167,111.5 71.5,111.5
VDD3.3 on Int2 (PWR) "VDD3.3_L03_P004" (solid, pour order 4): 111,103 111,97 106,97 106,81 124,81 125,81 125,103
GND on Int1 (GND) "GND_L02_P002" (solid, pour order 2): 71.5,70 ccw(c74,70) 74,67.5 167,67.5 ccw(c167,70) 169.5,70 169.5,109 ccw(c167,109) 167,111.5 71.5,111.5

## Keep-outs
Keep-Out Layer:
  the board outline again, w0.2

## Other copper
Top Layer:
  region net GND: 140.1,76 143.9,76 143.9,77.4 140.1,77.4
  region net VM48: 140,93 139,93 139,80.5 140.5,80.5 140.5,84 140,84

## Silkscreen, mask and mechanical layers (free items; w line width, h text height)
Top Overlay:
  text "GND" at 161.481,104.5 h2 r90
  text "SWDIO" at 122,103.514 h1.5
  text "<" at 159,102.519 h2
  text "TX" at 161.5,102 h2 r90
  text "GND" at 122,101.014 h1.5
  text ">" at 159,100.019 h2
  text "RX" at 161.5,99.5 h2 r90
  text "SWCLK" at 122,98.514 h1.5
  text "3.3" at 122,96.014 h1.5
  text "6V / OUT" at 81.5,85 h2 r90
  text "DO NOT PRESS" at 102.486,85 h1.5 r90
  text "GND" at 161.481,85 h2 r90
  text "dSIB-S v1" at 83.5,83.53 h4
  text "GND" at 80.481,81.5 h2 r90
  text "GND" at 161.481,81 h2 r90
  text "48V" at 161.481,77 h2 r90
  text "48V" at 161.481,73.5 h2 r90
  text "not firewire" at 147.5,71.515 h2
  text "LVDS" at 150.5,69.028 h3

## Text inside footprints (layer, text, board x,y; h text height)
J1: Top Overlay "26" at 82.71,103.02 h1.02 r180; Mechanical 2 "PCB Edge" at 94.77,112.92 h1.02 r180
J2: Top Overlay "15" at 135.08,103.02 h1.02 r180; Mechanical 2 "PCB Edge" at 144.58,112.92 h1.02 r180
J6: Top Overlay "1" at 77.954,82.954 h1; Top Overlay "2" at 77.754,84.954 h1
J9: Top Overlay "2" at 99.754,77.454 h1; Top Overlay "1" at 99.954,75.454 h1
J12: Top Overlay "1" at 119.954,75.454 h1; Top Overlay "2" at 119.754,77.454 h1
J19: Top Overlay "1" at 137.954,75.454 h1; Top Overlay "2" at 137.754,77.454 h1